# Altium PCB AVR ICSP.PcbDoc
Units mil, origin at the board's own origin, x right, y up, seen from the top; angles counter-clockwise.
Board outline 560 x 660.71 mil, 2 copper layers (Top Layer, Bottom Layer), stack 61.756 mil thick; 3 components, 6 nets, 12 pads, 6 vias.
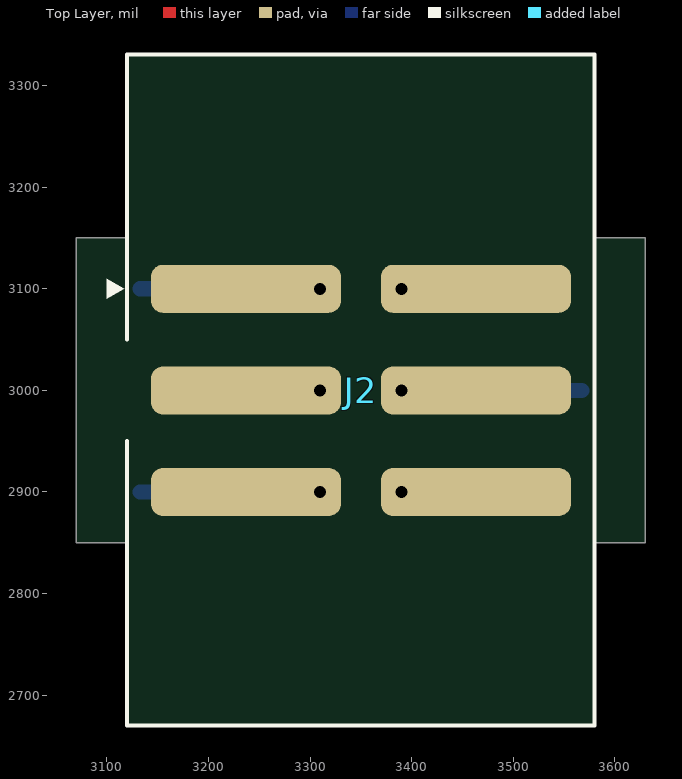
[diagram p0: Top Layer view]
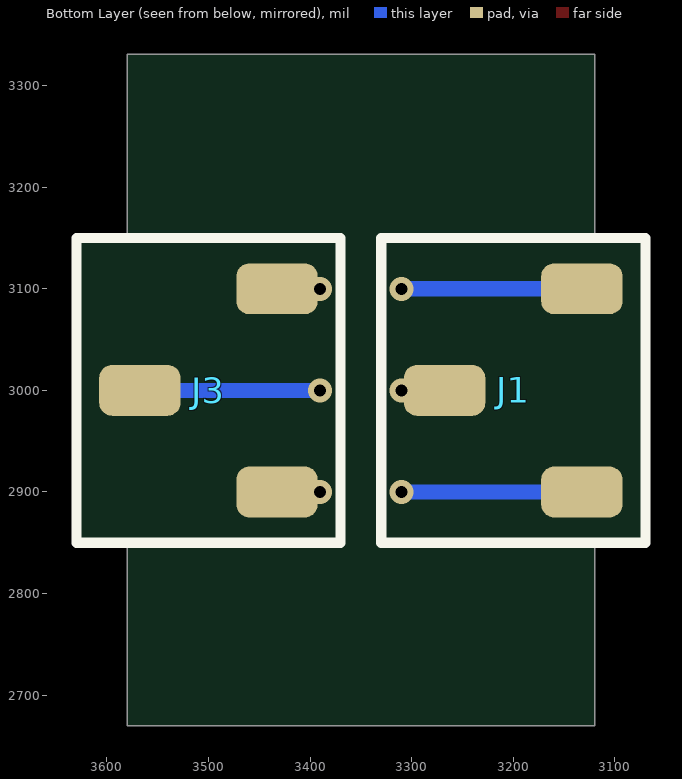
[diagram p1: Bottom Layer view, seen from below]

## Layer stack, top to bottom
Top Solder: solder mask 1, PSR-4000BN, Dk 4.5
Top Layer: signal copper 1.378
Dielectric 1: core 59, Kingboard KB6167F, Dk 4.5
Bottom Layer: signal copper 1.378
Bottom Solder: solder mask 1, PSR-4000BN, Dk 4.5

## Board outline
3070,2850 3120,2850 3120,2670 3580,2670 3580,2850 3630,2850 3630,3150 3580,3150 3580,3330.71 3120,3330.71 3120,3150 3070,3150

## Design rules (kind name [scope] priority, off if disabled: settings)
BoardOutlineClearance [All] p1: gap=7.87 ignorepadtopadclearanceinfootprint=FALSE
Clearance [All] p1: gap=5 ignorepadtopadclearanceinfootprint=FALSE except(9.84: Arc-Hole Track-Hole SMDPad-Hole THPad-Hole Via-Hole Fill-Hole Poly-Hole Region-Hole Text-Hole)
ComponentClearance [All] p1: gap=5 collisioncheckmode=3 verticalgap=5 showdistances=TRUE
DiffPairsRouting [All] p1: maxlimit=10 minlimit=5 mostfreqgap=5 toplayer_minwidth=5 toplayer_maxwidth=1000 toplayer_prefwidth=5 bottomlayer_minwidth=5 bottomlayer_maxwidth=1000 bottomlayer_prefwidth=5 maxuncoupledlength=500
Height [All] p1: minheight=0 maxheight=71497.94 prefheight=500
HoleSize [All] p1: absolutevalues=TRUE maxlimit=248.03 minlimit=11.81 maxpercent=80.000 minpercent=20.000
HoleToHoleClearance [All] p1: gap=9.84 allowstackedmicrovias=FALSE
MinimumAnnularRing [All] p1: minimumring=3
MinimumSolderMaskSliver [All] p1: minsoldermaskwidth=0
PlaneClearance [All] p1: clearance=5
PlaneConnect PlaneConnectPowerPads [InPadClass('PowerPads')] p1: planeconnectstyle=Direct reliefexpansion=20 reliefentries=4 reliefconductorwidth=10 reliefairgap=10
PlaneConnect [All] p2: pad.planeconnectstyle=Relief pad.reliefexpansion=11.81 pad.reliefentries=4 pad.reliefconductorwidth=5 pad.reliefairgap=5 via.planeconnectstyle=Direct via.reliefexpansion=11.81 via.reliefentries=4 via.reliefconductorwidth=5 via.reliefairgap=5
PolygonConnect PolygonConnectPowerPads [All vs (InPadClass('PowerPads'))] p1: connectstyle=Direct reliefconductorwidth=10 reliefentries=4 polygonreliefangle="90 Angle" airgapwidth=10
PolygonConnect [All] p2: thpad.connectstyle=Relief thpad.reliefconductorwidth=5 thpad.reliefentries=4 thpad.polygonreliefangle="90 Angle" thpad.airgapwidth=5 smdpad.connectstyle=Relief smdpad.reliefconductorwidth=5 smdpad.reliefentries=4 smdpad.polygonreliefangle="90 Angle" smdpad.airgapwidth=5 via.connectstyle=Direct via.reliefconductorwidth=5 via.reliefentries=4 via.polygonreliefangle="90 Angle" via.airgapwidth=5
RoutingVias [All] p1: holewidth=11.81 width=23.62 viastyle="Through Hole" minholewidth=11.81 minwidth=23.62 maxholewidth=23.62 maxwidth=259.84
SilkToSilkClearance [All] p1: silktosilkclearance=0
SilkToSolderMaskClearance [IsPad] p1: minsilkscreentomaskgap=5 clearancetoexposedcopper=TRUE
SolderMaskExpansion [All] p1: expansion=2.95 istentingtop=FALSE
Width [All] p1: maxlimit=1000 minlimit=5 preferedwidth=5 minimp=50.000000 maximp=50.000000 favimp=50.000000
20 further rules are at their usual default settings.

## Components (designator, comment, footprint, x,y, rotation, side; value= is the part's Value field where it differs from the comment)
J1 "3 contacts Male header" 10129380-903001ALF 3200,3000 r270 bottom locked
J2 "AVR ICSP" "3020-06-0300-00 ICSP AVR ICE NEW" 3350,3000 r90 top locked
J3 "3 contacts Male header" 10129380-903001ALF 3500,3000 r270 bottom

## Footprints (in the part's own frame and the unit in brackets; to place one, negate y for a bottom-side part, rotate by r counter-clockwise, add the part's x,y. Pads: shape width x height; smd on the part's side, far side on the other; paste and mask are expansions set on the pad)
"3020-06-0300-00 ICSP AVR ICE NEW" [mm]
  rrect50% 1.2x4.75 smd: 1(2.54,2.875) 2(2.54,-2.875) 3(0,2.875) 4(0,-2.875) 5(-2.54,2.875) 6(-2.54,-2.875)
  silkscreen extent -8.38,-5.84 8.4,6.35, body extent -7.62,-5.1 7.62,5.1, height 28.76
10129380-903001ALF [mil]
  rrect50% 50x80 smd: 1(-100,67.5) 2(0,-67.5) 3(100,67.5)
  silkscreen extent -150,-130 150,130, body extent -150,-95 150,95, height 390

## Part data
J1 J3: library part 10129380-903001ALF, "Connector Male Header 1X3 vertical 3contacts 0.100in pitch Gold finish SMD", Manufacturer=FCI, Supplier Part Number 1=10129380-903001ALF-ND, ComponentLink1Description="Manufacturer Website", ComponentLink1URL=http://www.fci.com, ComponentLink2Description="Component Datasheet", ComponentLink2URL=https://cdn.amphenol-icc.com/media/wysiwyg/files/drawing/10129380.pdf, ComponentLink3Description="Octopart Link", ComponentLink3URL=https://octopart.com/10129380-903001alf-amphenol+icc+%2F+fci-87314036?r=sp, Contact Finish=Gold, Description in Visual="Con Hdr Male 3contacts vertical 1X3", Gender=Male, Manufacturer P/N=10129380-903001ALF, Number of Contacts=3, Number of Rows=1, Orientation=vertical, P/N=10129380-903001ALF, PCB Package=10129380-903001ALF, Pitch=0.100in, Supplier 1=Digi-Key
J2: library part "AVR ICSP SHROUD SMD", "AVR Serial ICSP, Shrouded, SMD - 6 Pin Shrouded Header, 0.100\", SMD", Manufacturer="CNC Tech", Manufacturer P/N=3020-06-0300-00, ComponentLink1Description="Pinout Reference", ComponentLink1URL=http://ww1.microchip.com/downloads/en/DeviceDoc/Atmel-ICE_UserGuide.pdf, ComponentLink2Description="Datasheet for Connector", ComponentLink2URL=http://www.cnctech.us/pdfs/3020-XX-0300-00-TR.pdf, Contact Finish=Gold, Description in Visual="AVR Serial ICSP, Shrouded, SMD - 6 Pin Shrouded Header, 0.100\", SMD", Gender=Male, Number of Contacts=6, Number of Rows=2, Orientation=Vertical, P/N="AVR ICSP SHROUD SMD", Pitch="0.100\"", Supplier 1=Digi-Key, Supplier Part Number 1=3020-06-0300-00

## Via types
v1: diameter 23.62, hole 11.81, Top Layer to Bottom Layer, 6 vias

## Nets (pads, with @x,y where several pads share a name; then routed paths per layer and width w, separated by ;. In a path a pad name is that pad's centre, name@x,y a point inside that pad or via, vN(x,y) a via of type N, cw(c..) or ccw(c..) an arc to the next point about the centre after c; other vN are vias at no path point)
\RESET: J1.3 J2.5 | length 177.5
  Bottom Layer w15: J1.3 v1(3310,2900)
GND: J2.6 J3.3 | length 42.5
  Bottom Layer w15: v1(3390,2900) J3.3
PDI/MOSI: J2.4 J3.2 | length 177.5
  Bottom Layer w15: v1(3390,3000) J3.2
PDO/MISO: J1.1 J2.1 | length 177.5
  Bottom Layer w15: J1.1 v1(3310,3100)
SCK: J1.2 J2.3 | length 42.5
  Bottom Layer w15: J1.2 v1(3310,3000)
VTG: J2.2 J3.1 | length 42.5
  Bottom Layer w15: v1(3390,3100) J3.1

## Silkscreen, mask and mechanical layers (free items; w line width, h text height)
Board Outline:
  the board outline again, w1
CAM Title Block:
  drawing of 59 lines, arcs and shapes, not listed
  text "1" at 2335.71,9361.6 h48.36
  text "2" at 5078.83,9361.6 h48.36
  text "3" at 7831.96,9361.6 h48.36
  text "4" at 10577.58,9361.6 h48.36
  text "A" at 1062.54,8399.46 h48.36
  text "A" at 11863.26,8399.46 h48.36
  text "B" at 1067.54,6274.25 h48.36
  text "B" at 11867.43,6274.25 h48.36
  text "C" at 1066.7,4149.88 h48.36
  text "C" at 11866.6,4149.88 h48.36
  text "D" at 1064.2,2024.67 h48.36
  text "D" at 11864.1,2024.67 h48.36
  text "Title:" at 8274.69,1943.8 h65.87
  text "'.Pcb_File_Name_No_Path'" at 8624.88,1922.68 h63.36
  text "*" at 8524.83,1829.58 h32.52
  text "*" at 8524.83,1769.55 h32.52
  text "Desc:" at 8274.69,1757.04 h42.52
  text "*" at 8524.83,1709.52 h32.52
  text "Letter" at 8474.8,1561.94 h42.52
  text "Auth:" at 8875.01,1561.94 h42.52
  text "Proj:" at 9974.76,1561.94 h42.52
  text "Size:" at 8274.69,1556.94 h42.52
  text ".ProjAuth" at 9124.65,1540 h42.52
  text ".ProjShrtName" at 10175,1540 h42.52
  text "1" at 10274.92,1422.29 h37.52
  text "1" at 10575.08,1422.29 h37.52
  text "Date:" at 8274.69,1416.04 h37.52
  text "'.ModifiedDate'" at 8524.83,1416.04 h37.52
  text "Time:" at 9275.22,1416.04 h37.52
  text "'.ModifiedTime'" at 9485.34,1416.04 h37.52
  text "Sheet" at 9974.76,1416.04 h37.52
  text "of" at 10425,1416.04 h37.52
  text "Repo:" at 8274.69,1326 h37.52
  text ".ProjGitURL" at 8525,1325 h37.52
  text "File:" at 8274.69,1225.95 h37.52
  text "'.Pcb_File_Name'" at 8524.83,1225.95 h37.52
  text "1" at 2335.71,1062.53 h48.36
  text "2" at 5078.83,1062.53 h48.36
  text "3" at 7831.96,1062.53 h48.36
  text "4" at 10577.58,1062.53 h48.36